# Altium PCB 球锁蓝牙20818.PcbDoc (part 2 of 3)
Units mm, origin at the board's own origin, x right, y up, seen from the top; angles counter-clockwise.
Board outline 49.43 x 48.4 mm, 2 copper layers (Top Layer, Bottom Layer); 90 components, 56 nets, 267 pads, 205 vias.
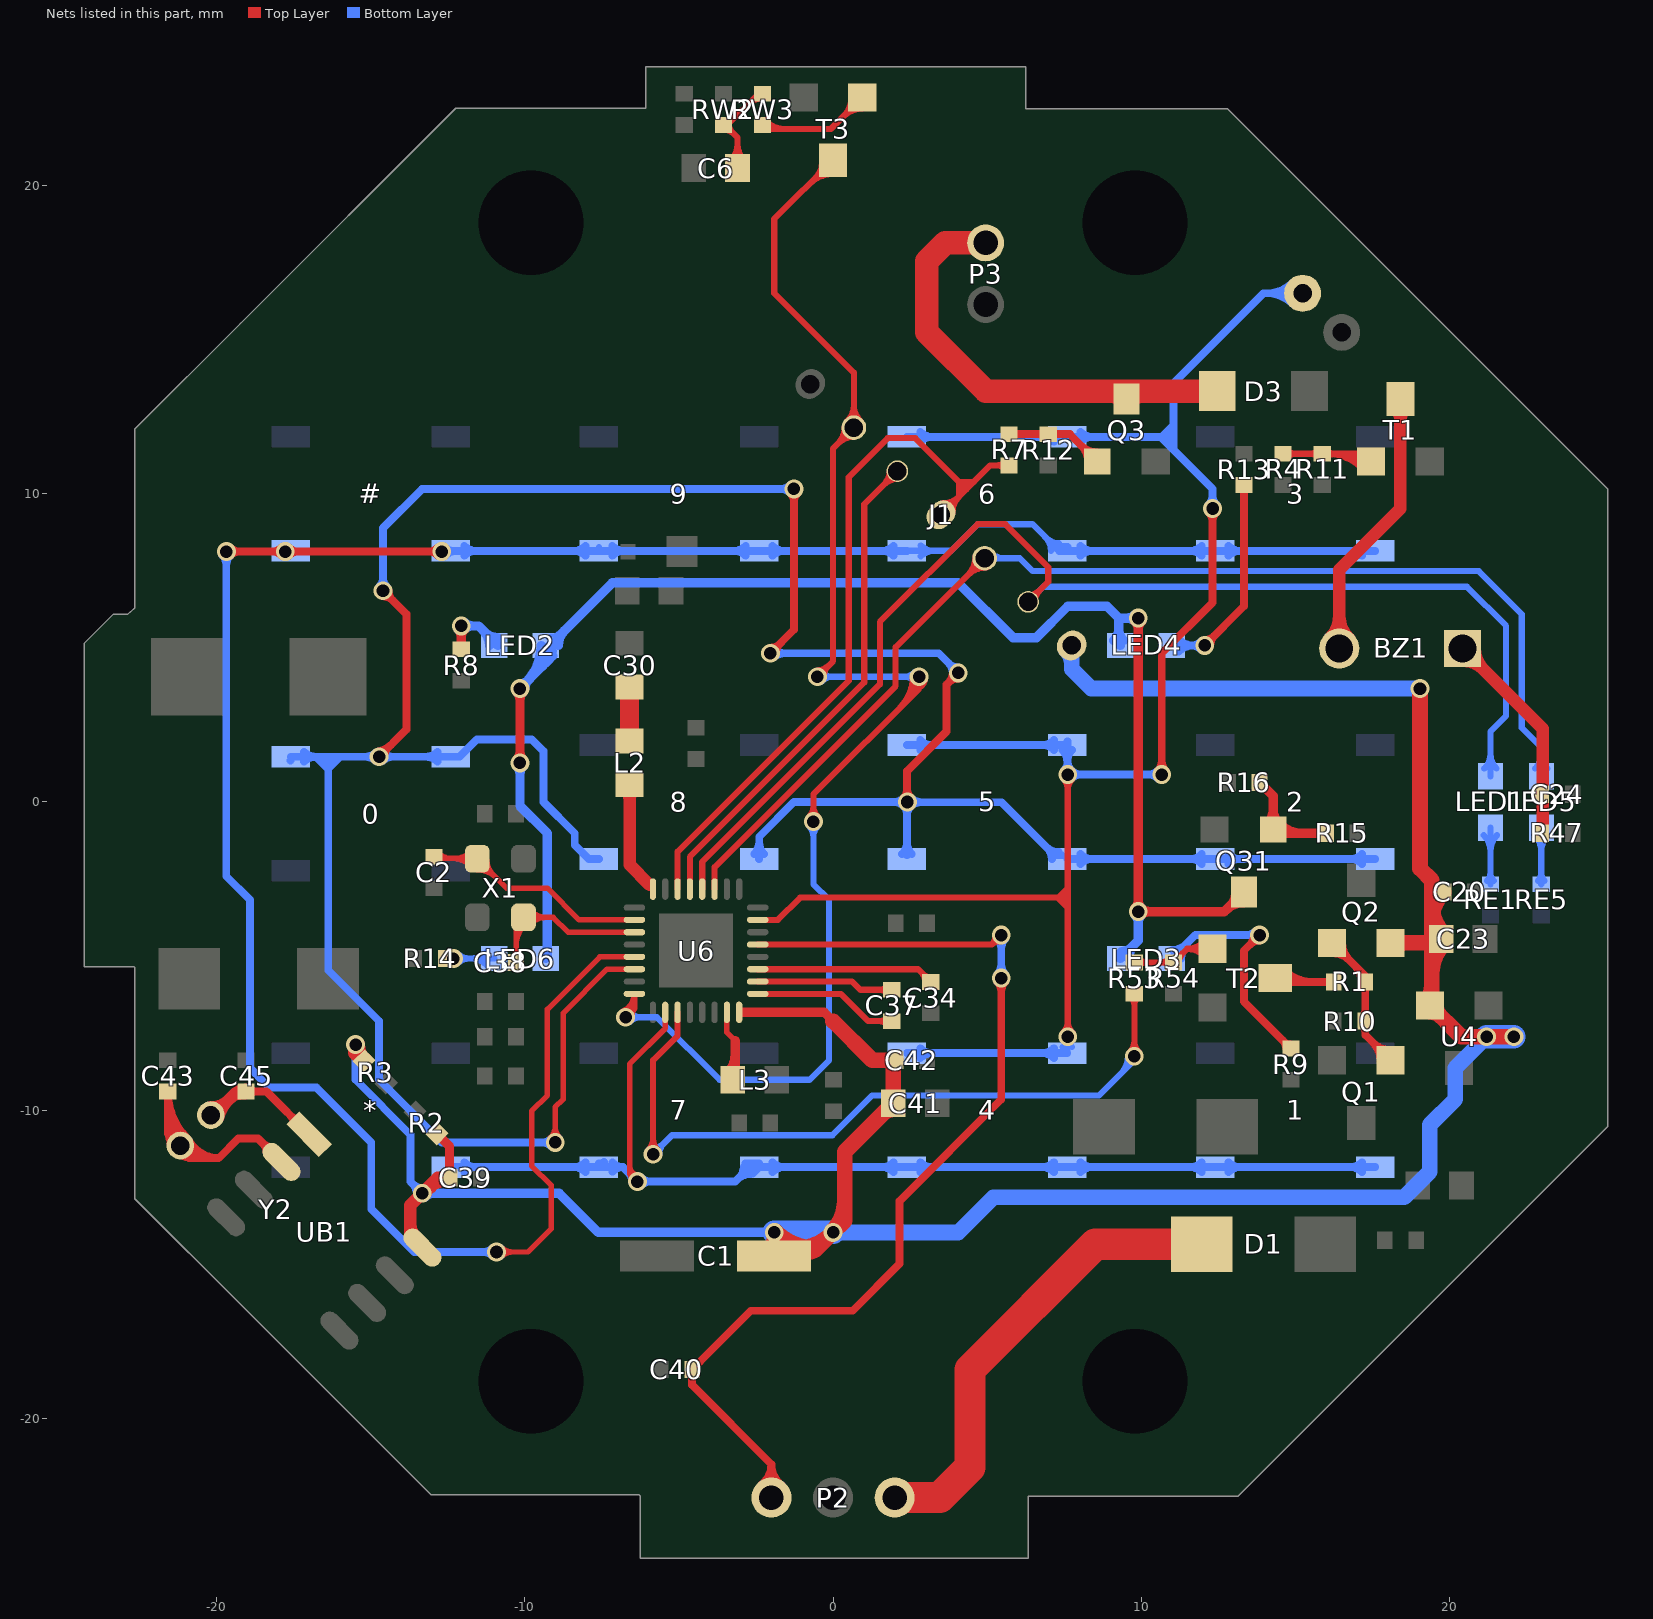
[diagram p2: the nets of this part, all layers, seen from the top]

## Via types
v1: diameter 0.61, hole 0.406, Top Layer to Bottom Layer, tented both sides, 204 vias
v2: diameter 0.6, hole 0.4, Top Layer to Bottom Layer, tented both sides, 1 vias

## Nets (pads, with @x,y where several pads share a name; then routed paths per layer and width w, separated by ;. In a path a pad name is that pad's centre, name@x,y a point inside that pad or via, vN(x,y) a via of type N, cw(c..) or ccw(c..) an arc to the next point about the centre after c; other vN are vias at no path point) (continued)
KEYY_1: 3.1 6.1 9.1 #.1 U6.5 | length 96
  Top Layer w0.178: v1(-10.922,-14.605) -9.906,-14.605 -9.144,-13.843 -9.144,-12.446 -9.779,-11.811 -9.779,-10.033 -9.271,-9.525 -9.271,-6.731 -7.566,-5.026 U6.5@-6.445,-5.026 ; v1@-10.769,-14.758 cw(c-10.401,-15.126) -10.401,-14.605 cw(c-10.401,-14.084) v1@-10.769,-14.452
  Top Layer w0.254: v1(-19.685,8.128) v1(-17.78,8.128) v1(-12.7,8.128) ; v1@-19.559,8.002 cw(c-19.256,7.699) -19.256,8.128 cw(c-19.256,8.557) v1@-19.559,8.254 ; v1@-17.906,8.002 ccw(c-18.209,7.699) -18.209,8.128 ccw(c-18.209,8.557) v1@-17.906,8.254 ; v1@-17.654,8.002 cw(c-17.351,7.699) -17.351,8.128 cw(c-17.351,8.557) v1@-17.654,8.254 ; v1@-12.826,8.002 ccw(c-13.129,7.699) -13.129,8.128 ccw(c-13.129,8.557) v1@-12.826,8.254
  Bottom Layer w0.203: 6.1@2.4,8.15 3.832,8.15 4.699,9.017 6.477,9.017 6.1@7.22,8.274 ; 6.1@2.851,7.974 cw(c3.275,7.55) 3.275,8.15 cw(c3.275,8.75) 6.1@2.851,8.326 ; 6.888,8.606 cw(c6.431,8.15) 6.1@7.077,8.15 ; 6.933,8.561 ccw(c7.325,8.952) 6.1@7.325,8.398
  Bottom Layer w0.254: v1@-19.811,8.002 cw(c-20.095,7.718) -19.693,7.718 ; -19.693,7.68 cw(c-19.237,7.68) v1@-19.559,8.002 ; v1@-19.693,8.128 -19.693,-2.405 -18.923,-3.175 -18.923,-8.636 -18.288,-9.271 -16.764,-9.271 -14.986,-11.049 -14.986,-13.208 -13.589,-14.605 v1(-10.922,-14.605) ; #.1@-12.574,8.002 cw(c-12.218,7.646) #.1@-12.218,8.15 ; #.1@-12.574,8.254 ccw(c-12.324,8.504) #.1@-12.324,8.15 ; #.1@-12.4,8.15 9.1@-7.6,8.15 9.1@-2.4,8.15 6.1@2.4,8.15 ; #.1@-11.967,7.992 cw(c-11.587,7.612) -11.587,8.15 cw(c-11.587,8.688) #.1@-11.967,8.308 ; v1@-11.048,-14.731 ccw(c-11.351,-15.034) -11.351,-14.605 ccw(c-11.351,-14.176) v1@-11.048,-14.479 ; 9.1@-8.033,7.992 ccw(c-8.413,7.612) -8.413,8.15 ccw(c-8.413,8.688) 9.1@-8.033,8.308 ; 9.1@-7.167,7.992 cw(c-6.787,7.612) -6.787,8.15 cw(c-6.787,8.688) 9.1@-7.167,8.308 ; 9.1@-2.833,7.992 ccw(c-3.213,7.612) -3.213,8.15 ccw(c-3.213,8.688) 9.1@-2.833,8.308 ; 9.1@-1.967,7.992 cw(c-1.587,7.612) -1.587,8.15 cw(c-1.587,8.688) 9.1@-1.967,8.308 ; 6.1@1.967,7.992 ccw(c1.587,7.612) 1.587,8.15 ccw(c1.587,8.688) 6.1@1.967,8.308 ; 6.1@7.604,8.274 7.22,8.274 7.344,8.15 6.1@7.6,8.15 3.1@12.4,8.15 3.1@17.6,8.15 ; 6.1@8.033,7.992 cw(c8.413,7.612) 8.413,8.15 cw(c8.413,8.688) 6.1@8.033,8.308 ; 3.1@11.967,7.992 ccw(c11.587,7.612) 11.587,8.15 ccw(c11.587,8.688) 3.1@11.967,8.308 ; 3.1@12.833,7.992 cw(c13.213,7.612) 13.213,8.15 cw(c13.213,8.688) 3.1@12.833,8.308 ; 3.1@17.167,7.992 ccw(c16.787,7.612) 16.787,8.15 ccw(c16.787,8.688) 3.1@17.167,8.308
KEYY_2: 0.1 2.1 5.1 8.1 U6.6 | length 120.6
  Top Layer w0.178: v1@-9.17,-10.896 ccw(c-9.538,-10.528) -9.017,-10.528 ccw(c-8.496,-10.528) v1@-8.864,-10.896 ; v1(-9.017,-11.049) -9.017,-9.906 -8.763,-9.652 -8.763,-6.858 -7.331,-5.426 U6.6@-6.445,-5.426
  Top Layer w0.254: v1(-14.732,1.469) -13.843,2.358 -13.843,6.096 v1(-14.605,6.858) ; v1@-14.732,1.649 ccw(c-14.865,2.364) -14.351,1.85 ; v1@-14.604,6.679 cw(c-14.604,6.25) -14.3,6.553 cw(c-13.997,6.857) v1@-14.426,6.857 ; v1@-14.6,1.396 cw(c-13.878,1.312) -14.478,1.723 ; v1(-2.032,4.826) -1.27,5.588 v1(-1.27,10.16) ; v1@-2.032,5.004 ccw(c-2.032,5.433) -1.728,5.13 ccw(c-1.425,4.826) v1@-1.854,4.826 ; v1@-1.396,10.034 cw(c-1.699,9.731) -1.27,9.731 cw(c-0.841,9.731) v1@-1.144,10.034 ; v1@2.287,0.126 ccw(c2.004,0.409) 2.405,0.409 ; v1@2.405,0 2.405,1.008 3.683,2.286 3.683,3.81 v1(4.064,4.191) ; 2.405,0.45 ccw(c2.863,0.45) v1@2.539,0.126 ; v1@3.886,4.191 cw(c3.457,4.191) 3.76,3.887 cw(c4.064,3.584) v1@4.064,4.013
  Bottom Layer w0.254: 0.1@-17.6,1.469 -16.787,1.469 ; 0.1@-17.167,1.311 cw(c-16.787,0.931) -16.787,1.469 ; 0.1@-17.167,1.627 ccw(c-16.787,2.007) -16.787,1.469 ; -16.383,1.345 -16.383,1.088 ; v1@-14.855,1.343 ccw(c-15.159,1.04) -15.159,1.469 ccw(c-15.159,1.898) v1@-14.855,1.595 ; v1@-14.729,6.982 ccw(c-15.033,7.286) -14.604,7.286 ccw(c-14.174,7.286) v1@-14.478,6.982 ; v1(-14.605,6.858) -14.605,8.89 -13.335,10.16 v1(-1.27,10.16) ; v1@-14.604,1.343 cw(c-14.3,1.04) -14.3,1.469 cw(c-14.3,1.898) v1@-14.604,1.595 ; 0.1@-12.833,1.311 ccw(c-13.213,0.931) -13.213,1.469 ccw(c-13.213,2.007) 0.1@-12.833,1.627 ; v1@-9.143,-11.175 ccw(c-9.446,-11.478) -9.446,-11.049 ccw(c-9.446,-10.62) v1@-9.143,-10.923 ; v1(-9.017,-11.049) -12.7,-11.049 -14.732,-9.017 -14.732,-7.112 -16.383,-5.461 -16.383,1.065 ; 8.1@-7.6,-1.85 -7.929,-1.85 -8.382,-1.397 -8.382,-1.016 -9.398,0 -9.398,1.651 -9.777,2.03 -11.559,2.03 -12.12,1.469 0.1@-12.4,1.469 v1(-14.732,1.469) -16.002,1.469 ; 8.1@-2.558,-1.692 ccw(c-2.949,-1.301) -2.396,-1.301 ; 8.1@-2.4,-1.85 -2.396,-1.846 -2.396,-1.126 -1.27,0 v1(2.413,0) ; -2.396,-1.322 ccw(c-1.872,-1.322) 8.1@-2.242,-1.692 ; v1(-2.032,4.826) 3.429,4.826 v1(4.064,4.191) ; v1@-1.906,4.7 cw(c-1.603,4.397) -1.603,4.826 cw(c-1.603,5.255) v1@-1.906,4.952 ; v1@-1.396,10.034 ccw(c-1.699,9.731) -1.699,10.16 ccw(c-1.699,10.589) v1@-1.396,10.286 ; 5.1@2.242,-1.692 ccw(c1.851,-1.301) 2.405,-1.301 ; v1@2.287,0.126 cw(c1.984,0.429) 1.984,0 cw(c1.984,-0.429) 2.287,-0.126 cw(c2.004,-0.409) 2.405,-0.409 ; 5.1@2.405,-1.726 2.405,-0.008 5.469,-0.008 7.187,-1.726 5.1@7.441,-1.726 ; 2.405,-1.322 ccw(c2.928,-1.322) 5.1@2.558,-1.692 ; 2.405,-0.45 cw(c2.863,-0.45) 2.539,-0.126 cw(c2.822,-0.409) 2.822,-0.008 ; v1@2.539,0.126 ccw(c2.863,0.45) 2.863,-0.008 ; v1@3.886,4.191 ccw(c3.457,4.191) 3.76,4.495 ccw(c4.064,4.798) v1@4.064,4.369 ; 6.92,-1.459 ccw(c7.325,-1.055) 5.1@7.325,-1.627 ; 6.954,-1.493 cw(c6.597,-1.85) 5.1@7.102,-1.85 ; 5.1@7.6,-1.85 2.1@12.4,-1.85 2.1@17.6,-1.85 ; 5.1@8.033,-2.008 cw(c8.413,-2.388) 8.413,-1.85 cw(c8.413,-1.312) 5.1@8.033,-1.692 ; 2.1@11.967,-2.008 ccw(c11.587,-2.388) 11.587,-1.85 ccw(c11.587,-1.312) 2.1@11.967,-1.692 ; 2.1@12.833,-2.008 cw(c13.213,-2.388) 13.213,-1.85 cw(c13.213,-1.312) 2.1@12.833,-1.692 ; 2.1@17.167,-2.008 ccw(c16.787,-2.388) 16.787,-1.85 ccw(c16.787,-1.312) 2.1@17.167,-1.692 ; -16.787,1.469 -16.383,1.065 ; -16.787,1.469 -16.002,1.469 ; -16.383,1.065 -16.383,1.088 ; -16.383,1.088 -16.002,1.469
KEYY_3: 1.1 4.1 7.1 *.1@-12.4,-11.85 U6.10 | length 50.4
  Top Layer w0.178: -6.604,-12.003 ccw(c-6.325,-12.003) v1@-6.347,-12.281 ; -6.604,-11.811 ccw(c-6.31,-11.811) v1@-6.333,-12.104 ; v1@-6.556,-12.256 ccw(c-6.739,-12.2) -6.604,-12.065 ; v1@-6.413,-12.113 cw(c-6.469,-11.93) -6.604,-12.065 ; v1(-6.35,-12.319) -6.604,-12.065 ; U6.10@-5.445,-6.826 -5.445,-7.35 -6.604,-8.509 -6.604,-12.065
  Bottom Layer w0.254: *.1@-12.4,-11.85 7.1@-7.6,-11.85 ; *.1@-11.967,-12.008 cw(c-11.587,-12.388) -11.587,-11.85 cw(c-11.587,-11.312) *.1@-11.967,-11.692 ; 7.1@-8.033,-12.008 ccw(c-8.413,-12.388) -8.413,-11.85 ccw(c-8.413,-11.312) 7.1@-8.033,-11.692 ; 7.1@-7.434,-11.684 7.1@-7.6,-11.85 ; 7.1@-7.16,-12 cw(c-6.819,-12.312) -6.819,-11.85 ; 7.1@-7.16,-11.7 ccw(c-6.819,-11.388) -6.819,-11.85 ; v1@-6.528,-12.319 ccw(c-6.957,-12.319) -6.654,-12.015 ccw(c-6.35,-11.712) v1@-6.35,-12.141 ; v1@-6.224,-12.445 cw(c-5.921,-12.748) -5.921,-12.319 cw(c-5.921,-11.89) v1@-6.224,-12.193 ; -3.109,-12.253 cw(c-2.675,-12.686) 7.1@-2.675,-12.073 ; -3.034,-12.178 ccw(c-3.362,-11.85) 7.1@-2.898,-11.85 ; 7.1@-2.836,-11.726 7.1@-2.396,-11.726 ; 7.1@-1.967,-12.008 cw(c-1.587,-12.388) -1.587,-11.85 cw(c-1.587,-11.312) 7.1@-1.967,-11.692 ; 4.1@1.967,-12.008 ccw(c1.587,-12.388) 1.587,-11.85 ccw(c1.587,-11.312) 4.1@1.967,-11.692 ; 4.1@2.833,-12.008 cw(c3.213,-12.388) 3.213,-11.85 cw(c3.213,-11.312) 4.1@2.833,-11.692 ; 4.1@7.167,-12.008 ccw(c6.787,-12.388) 6.787,-11.85 ccw(c6.787,-11.312) 4.1@7.167,-11.692 ; 4.1@8.033,-12.008 cw(c8.413,-12.388) 8.413,-11.85 cw(c8.413,-11.312) 4.1@8.033,-11.692 ; 1.1@11.967,-12.008 ccw(c11.587,-12.388) 11.587,-11.85 ccw(c11.587,-11.312) 1.1@11.967,-11.692 ; 1.1@12.833,-12.008 cw(c13.213,-12.388) 13.213,-11.85 cw(c13.213,-11.312) 1.1@12.833,-11.692 ; 1.1@17.167,-12.008 ccw(c16.787,-12.388) 16.787,-11.85 ccw(c16.787,-11.312) 1.1@17.167,-11.692 ; 1.1@17.6,-11.85 1.1@12.4,-11.85 4.1@7.6,-11.85 4.1@2.4,-11.85 7.1@-2.4,-11.85 ; 7.1@-7.6,-11.85 -6.819,-11.85 ; -6.819,-11.85 v1(-6.35,-12.319) -3.175,-12.319 7.1@-2.921,-12.065 ; 7.1@-2.921,-12.065 -2.706,-11.85 7.1@-2.4,-11.85 ; 7.1@-2.921,-12.065 -2.615,-12.065 7.1@-2.4,-11.85
M3V3: C1.1 C20.1 C23.1 C39.1 C41.1 C42.1 J1.1 Q2.S R2.1 R3.1 U4.2 U6.16 UB1.8 | length 113.6
  Top Layer w0.305: UB1.8@-13.335,-14.451 UB1.8@-13.324,-14.461 ; R2.1@-12.849,-10.773 -12.446,-11.176 C39.1@-12.446,-12.192 ; U6.16@-2.972,-6.826 -0.286,-6.826 0,-7.112
  Top Layer w0.406: -13.716,-13.733 ccw(c-13.232,-13.733) UB1.8@-13.574,-14.075 ; UB1.8@-13.335,-14.451 -13.716,-14.07 -13.716,-13.081 v1(-13.335,-12.7) -12.827,-12.192 C39.1@-12.446,-12.192 ; v1@-13.237,-12.726 cw(c-12.869,-12.825) -13.059,-12.495 ; v1@-13.226,-12.591 cw(c-12.446,-13.372) C39.1@-12.446,-12.268
  Top Layer w0.508: v1@-15.443,-7.874 ccw(c-14.707,-7.874) R3.1@-15.228,-8.394 ; R3.1@-15.218,-8.404 -15.494,-8.128 v1(-15.494,-7.874) ccw(c-14.901,-7.874) R3.1@-15.2,-8.386 ; C1.1@-2.595,-14.605 C1.1@-1.96,-14.605 ; C1.1@-2.084,-14.558 ccw(c-2.516,-14.126) v1@-1.905,-14.126 ; C1.1@-1.91,-14.478 C1.1@-1.905,-14.478 ; v1@-1.905,-14.15 ccw(c-1.328,-14.15) C1.1@-1.736,-14.558 ; v1(-1.905,-13.97) C1.1@-1.905,-14.478 ; v1@-1.869,-13.934 ccw(c-0.556,-12.621) -0.556,-14.478 ; C1.1@-1.21,-14.486 ccw(c-1.21,-12.811) v1@-0.025,-13.995 ; C1.1@-1.07,-14.529 ccw(c-0.82,-14.166) -0.508,-14.478 ; C1.1@-1.016,-14.605 C1.1@-1.96,-14.605 ; C1.1@-0.978,-14.812 cw(c-0.508,-14.975) -0.508,-14.478 ; v1@-0.036,-13.934 ccw(c-1.042,-12.928) 0.381,-12.928 ; 0,-7.112 1.27,-8.382 C42.1@2.032,-8.382 1.956,-8.458 C41.1@1.956,-9.779 0.381,-11.354 0.381,-13.589 v1(0,-13.97) -0.508,-14.478 ; C41.1@1.621,-10.114 cw(c1.956,-10.448) C41.1@1.956,-9.975 ; Q2.S@18.095,-4.572 C23.1@19.431,-4.572 ; Q2.S@18.239,-4.716 cw(c18.586,-5.063) 18.586,-4.572 cw(c18.586,-4.081) Q2.S@18.239,-4.428 ; v1(19.05,3.683) 19.05,-2.159 19.431,-2.54 19.431,-2.921 ; 19.197,-4.572 ccw(c19.197,-3.957) C23.1@19.633,-4.392 ; U4.2@19.226,-6.46 ccw(c18.732,-5.966) 19.431,-5.966 ; U4.2@19.37,-6.807 cw(c19.37,-7.298) 19.717,-6.951 cw(c20.064,-6.604) U4.2@19.573,-6.604 ; 19.431,-5.583 cw(c20.824,-5.583) C23.1@19.839,-4.598 ; 19.431,-3.866 cw(c20.732,-3.866) C20.1@19.812,-2.946 ; 19.431,-3.307 ccw(c20.824,-3.307) C23.1@19.839,-4.292 ; C23.1@19.736,-4.445 19.609,-4.572 C23.1@19.431,-4.572 ; C20.1@19.812,-2.921 19.431,-2.921 ; v1(22.098,-7.62) 20.386,-7.62 U4.2@19.37,-6.604 19.431,-6.543 C23.1@19.431,-4.572 ; C1.1@-1.96,-14.605 -1.905,-14.55 C1.1@-1.905,-14.478 ; C1.1@-1.905,-14.478 -0.508,-14.478 ; C23.1@19.431,-4.572 19.431,-2.921
  Bottom Layer w0.254: v1@-15.62,-8 cw(c-15.923,-8.303) -15.494,-8.303 cw(c-15.065,-8.303) v1@-15.368,-8 ; v1(-15.494,-7.874) -15.494,-9.017 -13.716,-10.795 -13.716,-12.319 v1(-13.335,-12.7) ; v1@-13.513,-12.7 ccw(c-13.942,-12.7) -13.639,-12.396 ccw(c-13.335,-12.093) v1@-13.335,-12.522
  Bottom Layer w0.305: v1(-13.335,-12.7) -8.89,-12.7 -7.62,-13.97 v1(-1.905,-13.97) ; v1@-13.227,-12.808 cw(c-12.967,-13.068) -12.967,-12.7 cw(c-12.967,-12.332) v1@-13.227,-12.592 ; v1@-2.013,-14.078 ccw(c-2.273,-14.338) -2.273,-13.97 ccw(c-2.273,-13.602) v1@-2.013,-13.862
  Bottom Layer w0.508: v1(0,-13.97) 4.064,-13.97 5.207,-12.827 18.542,-12.827 19.367,-12.002 19.367,-10.477 20.193,-9.652 20.193,-8.636 v1(21.209,-7.62) ; J1.1@7.573,4.906 cw(c7.153,4.486) 7.747,4.486 ; J1.1@7.747,5.08 7.747,4.318 8.382,3.683 v1(19.05,3.683)
  Bottom Layer w0.762: v1(-1.905,-13.97) v1(0,-13.97) ; v1(21.209,-7.62) v1(22.098,-7.62)
NetBZ1_1: BZ1.1 C24.2 R47.1 | length 8.6
  Top Layer w0.406: BZ1.1@20.43,4.587 cw(c20.43,3.629) 21.107,4.306 cw(c21.784,4.984) BZ1.1@20.827,4.984 ; BZ1.1@20.43,4.984 23.038,2.375 23.038,0.285 R47.1@23.038,-0.985
NetBZ1_2: BZ1.2 T1.3 | length 11.6
  Top Layer w0.406: BZ1.2@16.114,5.299 ccw(c15.351,6.062) 16.43,6.062 ccw(c17.508,6.062) BZ1.2@16.746,5.299 ; BZ1.2@16.43,4.984 16.43,6.27 16.43,7.54 18.415,9.525 T1.3@18.415,13.081 ; T1.3@18.235,12.809 cw(c17.802,12.375) 18.415,12.375 cw(c19.028,12.375) T1.3@18.595,12.809
NetC2_2: C2.2 U6.2 X1.1 | length 10.7
  Top Layer w0.178: C2.2@-12.954,-1.829 C2.2@-12.923,-1.829 ; C2.2@-12.954,-1.798 C2.2@-12.923,-1.829 ; C2.2@-12.812,-1.895 cw(c-12.653,-2.054) -12.653,-1.829 ; C2.2@-12.812,-1.661 ccw(c-12.407,-1.257) -12.407,-1.829 ; -12.333,-1.829 cw(c-12.333,-2.632) X1.1@-11.765,-2.064 ; -12.259,-1.829 ccw(c-12.259,-1.13) X1.1@-11.765,-1.624 ; X1.1@-11.545,-2.205 cw(c-11.545,-3.077) -10.929,-2.46 ; X1.1@-11.545,-2.027 cw(c-11.545,-2.47) X1.1@-11.232,-2.157 ; X1.1@-11.234,-1.894 ccw(c-10.604,-1.894) -11.049,-2.34 ; U6.2@-6.445,-3.826 -8.239,-3.826 -9.271,-2.794 -10.595,-2.794 X1.1@-11.545,-1.844 -11.56,-1.829 C2.2@-12.923,-1.829
NetC6_2: C6.2 RW2.2 RW3.2 | length 6
  Top Layer w0.203: RW2.2@-3.531,21.819 cw(c-3.531,21.389) -3.227,21.693 ; RW2.2@-3.531,22.123 ccw(c-3.531,22.737) -3.097,22.303 ; RW2.2@-3.378,21.971 ccw(c-3.072,21.971) RW2.2@-3.288,21.754 ; C6.2@-3.31,20.835 ccw(c-3.819,21.344) -3.099,21.344 ccw(c-2.378,21.344) C6.2@-2.888,20.835 ; C6.2@-3.099,20.574 -3.099,21.565 -3.556,22.022 -3.378,22.022 -2.464,22.936 RW3.2@-2.286,22.936 ; -2.745,22.655 cw(c-2.311,22.221) RW3.2@-2.311,22.835
NetC29_1: 
NetC29_2: 
NetC30_1: C30.1 L2.1 | length 1.8
  Top Layer w0.61: L2.1@-6.604,1.981 C30.1@-6.604,3.734
NetC34_1: C34.1 U6.19 | length 6.4
  Top Layer w0.2: U6.19@-2.445,-5.426 2.759,-5.426 C34.1@3.175,-5.842 ; 2.869,-5.536 cw(c2.562,-5.842) C34.1@2.996,-5.842 ; C34.1@2.93,-5.597 ccw(c3.15,-5.378) C34.1@3.15,-5.688
NetC37_1: C37.1 U6.17 | length 5.3
  Top Layer w0.2: U6.17@-2.445,-6.226 0.257,-6.226 1.143,-7.112 C37.1@1.905,-7.112 ; C37.1@1.771,-7.221 ccw(c1.508,-7.484) 1.508,-7.112 ccw(c1.508,-6.74) C37.1@1.771,-7.003
NetC37_2: C37.2 U6.18 | length 5
  Top Layer w0.2: U6.18@-2.445,-5.826 0.619,-5.826 0.889,-6.096 C37.2@1.905,-6.096 ; C37.2@1.771,-6.205 ccw(c1.508,-6.468) 1.508,-6.096 ccw(c1.508,-5.724) C37.2@1.771,-5.987
NetC38_2: C38.2 U6.3 X1.3 | length 10.3
  Top Layer w0.178: C38.2@-10.404,-5.065 ccw(c-10.686,-4.783) -10.287,-4.783 ccw(c-9.888,-4.783) C38.2@-10.17,-5.065 ; C38.2@-10.338,-5.207 C38.2@-10.287,-5.156 ; C38.2@-10.287,-5.207 C38.2@-10.287,-5.156 ; -10.287,-4.7 cw(c-9.139,-4.7) X1.3@-9.951,-3.888 ; -10.287,-4.271 cw(c-9.568,-4.271) X1.3@-10.076,-3.763 ; X1.3@-9.825,-3.964 cw(c-9.294,-4.495) -9.294,-3.744 cw(c-9.294,-2.993) X1.3@-9.825,-3.524 ; -6.985,-4.226 -8.601,-4.226 ; U6.3@-6.445,-4.226 -8.601,-4.226 ; C38.2@-10.287,-5.156 -10.287,-3.986 X1.3@-10.045,-3.744 -9.083,-3.744 -8.601,-4.226
NetC43_1: C43.1 UB1.2 Y2.2 | length 14.9
  Top Layer w0.254: C43.1@-21.68,-9.488 cw(c-21.897,-9.705) -21.59,-9.705 cw(c-21.283,-9.705) C43.1@-21.5,-9.488 ; -21.59,-10.617 ccw(c-20.655,-10.617) Y2.2@-21.313,-11.281 ; -21.59,-10.008 ccw(c-20.05,-10.008) Y2.2@-21.134,-11.101 ; Y2.2@-21.497,-11.074 ccw(c-21.838,-10.991) -21.59,-10.743 ; Y2.2@-21.344,-11.24 ccw(c-20.805,-10.939) -20.805,-11.557 ; Y2.2@-21.259,-10.836 cw(c-21.342,-10.495) -21.59,-10.743 ; Y2.2@-21.123,-11.116 ccw(c-20.372,-10.697) -20.372,-11.557 ; Y2.2@-21.107,-11.464 cw(c-21.024,-11.805) -20.776,-11.557 ; Y2.2@-20.956,-10.921 cw(c-19.446,-9.398) C43.1@-21.59,-9.398 -21.59,-10.743 ; Y2.2@-20.901,-10.992 ccw(c-19.939,-10.455) -19.939,-11.557 ; Y2.2@-20.869,-11.226 ccw(c-20.528,-11.309) -20.776,-11.557 ; UB1.2@-18.391,-11.364 ccw(c-18.808,-11.364) -18.513,-11.069 ccw(c-18.218,-10.774) UB1.2@-18.218,-11.191 ; UB1.2@-17.899,-11.683 -18.66,-10.922 -19.304,-10.922 -19.939,-11.557 ; -21.59,-10.743 Y2.2@-21.183,-11.15 -20.776,-11.557 ; -20.776,-11.557 -19.939,-11.557
NetC45_2: C45.2 UB1.1 Y2.1 | length 9.5
  Top Layer w0.254: Y2.1@-20.193,-10.16 -19.431,-9.398 C45.2@-19.05,-9.398 -18.388,-9.398 UB1.1@-17.001,-10.784 ; Y2.1@-20.193,-9.837 ccw(c-20.193,-9.057) -19.642,-9.609 ccw(c-19.09,-10.16) Y2.1@-19.87,-10.16 ; Y2.1@-20.109,-9.848 ccw(c-20.003,-9.449) -19.796,-9.807 ; Y2.1@-19.899,-9.866 cw(c-19.075,-10.69) C45.2@-19.075,-9.525 ; Y2.1@-19.881,-10.244 cw(c-18.773,-10.54) -19.347,-9.547 ; -19.466,-9.433 cw(c-19.075,-9.823) C45.2@-19.075,-9.271 ; C45.2@-19.165,-9.488 ccw(c-19.382,-9.705) -19.382,-9.398 ccw(c-19.382,-9.091) C45.2@-19.165,-9.308 ; C45.2@-18.935,-9.488 cw(c-18.718,-9.705) -18.718,-9.398 cw(c-18.718,-9.091) C45.2@-18.935,-9.308 ; UB1.1@-17.493,-10.466 ccw(c-17.91,-10.466) -17.615,-10.171 ccw(c-17.32,-9.876) UB1.1@-17.32,-10.293
NetD1_1: D1.1 P2.1 | length 16.7
  Top Layer w1.016: P2.1@2,-22.575 3.46,-22.575 4.445,-21.59 4.445,-18.415 8.509,-14.351 D1.1@11.97,-14.351 ; D1.1@11.593,-14.628 ccw(c10.924,-15.297) 10.924,-14.351 ccw(c10.924,-13.405) D1.1@11.593,-14.074
NetD3_1: D3.1 P3.1 Q3.C | length 15.8
  Top Layer w0.762: P3.1@4.953,18.145 3.636,18.145 3.048,17.557 3.048,15.24 4.953,13.335 D3.1@12.47,13.335 ; 8.987,13.335 cw(c8.987,12.618) Q3.C@9.494,13.125 ; Q3.C@9.556,13.125 cw(c10.063,12.618) 10.063,13.335
NetL2_2: L2.2 U6.32 | length 4.3
  Top Layer w0.406: L2.2@-6.743,0.42 cw(c-7.079,0.084) -6.604,0.084 cw(c-6.129,0.084) L2.2@-6.465,0.42 ; L2.2@-6.604,0.559 -6.604,-2.032 -5.948,-2.688
NetL3_2: L3.2 U6.15 | length 3.3
  Top Layer w0.178: U6.15@-3.445,-6.826 -3.445,-7.477 -3.175,-7.747
  Top Layer w0.305: L3.2@-3.426,-8.792 ccw(c-4.033,-8.185) -3.175,-8.185 ; L3.2@-3.251,-9.017 -3.175,-8.941 -3.175,-7.747 ; -3.175,-8.553 ccw(c-2.837,-8.553) L3.2@-3.076,-8.792
NetLED1_1: LED1.1 RE1.2 | length 3.6
  Bottom Layer w0.203: LED1.1@21.12,-1.079 cw(c20.6,-1.599) 21.336,-1.599 cw(c22.072,-1.599) LED1.1@21.552,-1.079 ; RE1.2@21.228,-2.559 ccw(c20.968,-2.299) 21.336,-2.299 ccw(c21.704,-2.299) RE1.2@21.444,-2.559 ; RE1.2@21.336,-2.667 LED1.1@21.336,-0.838
NetLED2_1: LED2.1 R8.2 | length 4.4
  Top Layer w0.3: v1@-12.174,5.606 cw(c-12.439,5.341) -12.065,5.341 cw(c-11.691,5.341) v1@-11.956,5.606 ; R8.2@-12.065,4.953 v1(-12.065,5.715)
  Bottom Layer w0.3: v1(-12.065,5.715) -11.506,5.715 LED2.1@-10.871,5.08 ; v1@-11.956,5.606 cw(c-11.691,5.341) -11.691,5.715 cw(c-11.691,6.089) v1@-11.956,5.824 ; -11.352,5.561 cw(c-11.833,5.08) LED2.1@-11.153,5.08 ; -11.291,5.5 ccw(c-10.897,5.894) LED2.1@-10.897,5.336
NetLED2_2: LED2.2 LED3.2 LED4.2 LED6.2 Q31.C | length 60.7
  Top Layer w0.305: v1@-10.268,1.365 ccw(c-10.528,1.626) -10.16,1.626 ccw(c-9.792,1.626) v1@-10.052,1.365 ; v1@-10.268,3.575 cw(c-10.528,3.315) -10.16,3.315 cw(c-9.792,3.315) v1@-10.052,3.575 ; v1(-10.16,1.27) v1(-10.16,3.683) ; v1@9.798,-3.448 ccw(c9.538,-3.188) 9.906,-3.188 ccw(c10.274,-3.188) 10.014,-3.448 ccw(c10.274,-3.188) 10.274,-3.556 ccw(c10.274,-3.924) v1@10.014,-3.664 ; v1@9.798,5.861 cw(c9.538,5.601) 9.906,5.601 cw(c10.274,5.601) v1@10.014,5.861 ; v1(9.906,5.969) v1(9.906,-3.556) 12.7,-3.556 Q31.C@13.335,-2.921 ; 12.742,-3.514 cw(c13.335,-4.108) Q31.C@13.335,-3.269 ; Q31.C@12.923,-3.333 ccw(c12.585,-2.996) Q31.C@13.062,-2.996
  Bottom Layer w0.305: v1@-10.268,1.175 cw(c-10.528,0.914) -10.16,0.914 cw(c-9.792,0.914) v1@-10.052,1.175 ; v1(-10.16,1.27) -10.16,-0.127 -9.271,-1.016 -9.271,-5.029 LED6.2@-9.322,-5.08 LED6.2@-9.322,-4.902 ; v1(-10.16,3.683) -9.457,4.386 ; v1@-10.16,3.835 ccw(c-10.16,4.203) -9.9,3.943 ccw(c-9.64,3.683) v1@-10.008,3.683 ; v1@-9.977,3.866 ccw(c-11.191,5.08) LED2.2@-9.474,5.08 ; LED2.2@-9.407,4.918 cw(c-9.736,4.589) -9.271,4.589 ; LED2.2@-9.169,5.08 cw(c-10.151,5.08) -9.457,4.386 ; LED2.2@-9.144,5.309 ccw(c-9.144,5.738) -8.84,5.434 ; LED2.2@-9.108,4.897 ccw(c-8.863,4.571) -9.271,4.571 ; LED2.2@-9.095,4.748 -9.271,4.572 ; LED2.2@-8.915,5.08 cw(c-8.241,5.08) -8.718,5.557 ; LED4.2@9.109,5.242 ccw(c8.719,5.632) 9.271,5.632 ccw(c9.823,5.632) LED4.2@9.433,5.242 ; LED3.2@9.322,-4.902 LED3.2@9.322,-5.08 9.906,-4.496 v1(9.906,-3.556) ; LED4.2@9.322,5.08 9.271,5.131 9.271,5.969 ; LED3.2@9.373,-4.851 ccw(c9.373,-4.422) LED3.2@9.676,-4.726 ; LED3.2@9.601,-5.08 cw(c10.276,-5.08) 9.799,-4.603 ; v1@9.798,-3.664 cw(c9.538,-3.924) 9.906,-3.924 cw(c10.274,-3.924) v1@10.014,-3.664 ; v1@9.798,5.861 ccw(c9.538,5.601) 9.538,5.969 ccw(c9.538,6.337) v1@9.798,6.077 ; v1(9.906,5.969) 9.271,5.969 ; -9.457,4.386 -9.271,4.572 ; -9.271,4.572 LED2.2@-9.271,4.826 ; LED2.2@-9.271,4.826 -9.271,5.004 LED2.2@-9.195,5.08 ; LED2.2@-9.271,4.826 -9.195,4.902 LED2.2@-9.195,5.08 ; LED2.2@-9.195,5.08 -7.163,7.112 4.064,7.112 5.842,5.334 6.604,5.334 7.62,6.35 8.89,6.35 9.271,5.969
NetLED3_1: LED3.1 R9.2 | length 10.6
  Top Layer w0.254: v1@13.665,-4.318 cw(c13.236,-4.318) 13.539,-4.622 cw(c13.843,-4.925) v1@13.843,-4.496 ; v1(13.843,-4.318) 13.335,-4.826 13.335,-6.477 R9.2@14.859,-8.001 ; 14.599,-7.741 cw(c14.339,-8.001) R9.2@14.707,-8.001 ; R9.2@14.66,-7.802 ccw(c14.834,-7.629) R9.2@14.834,-7.874
  Bottom Layer w0.254: LED3.1@10.998,-5.08 11.76,-4.318 v1(13.843,-4.318) ; LED3.1@11.024,-4.801 ccw(c11.024,-4.187) 11.457,-4.621 ; LED3.1@11.303,-5.08 cw(c12.039,-5.08) 11.519,-4.56 ; v1@13.717,-4.444 ccw(c13.414,-4.747) 13.414,-4.318 ccw(c13.414,-3.889) v1@13.717,-4.192
NetLED4_1: LED4.1 R13.2 | length 9.7
  Top Layer w0.254: v1(12.065,5.08) 13.335,6.35 R13.2@13.335,10.287 ; v1@12.065,5.258 ccw(c12.065,5.687) 12.369,5.384 ccw(c12.672,5.08) v1@12.243,5.08 ; R13.2@13.245,10.197 cw(c13.028,9.98) 13.335,9.98 cw(c13.642,9.98) R13.2@13.425,10.197
  Bottom Layer w0.254: LED4.1@10.998,5.08 v1(12.065,5.08) ; LED4.1@11.221,4.882 cw(c11.698,4.405) 11.698,5.08 cw(c11.698,5.755) LED4.1@11.221,5.278 ; v1@11.939,4.954 ccw(c11.636,4.651) 11.636,5.08 ccw(c11.636,5.509) v1@11.939,5.206
NetLED5_1: LED5.1 RE5.2 | length 3.6
  Bottom Layer w0.2: LED5.1@22.77,-1.08 cw(c22.247,-1.603) 22.987,-1.603 cw(c23.727,-1.603) LED5.1@23.204,-1.08 ; RE5.2@22.878,-2.558 ccw(c22.615,-2.295) 22.987,-2.295 ccw(c23.359,-2.295) RE5.2@23.096,-2.558 ; RE5.2@22.987,-2.667 LED5.1@22.987,-0.838
NetLED6_1: LED6.1 R14.2 | length 3.5
  Top Layer w0.305: R14.2@-12.573,-5.08 v1(-12.319,-5.08)
  Bottom Layer w0.203: v1(-12.319,-5.08) LED6.1@-10.998,-5.08 ; v1@-12.175,-5.224 cw(c-11.828,-5.571) -11.828,-5.08 cw(c-11.828,-4.589) v1@-12.175,-4.936 ; LED6.1@-11.239,-5.296 ccw(c-11.759,-5.816) -11.759,-5.08 ccw(c-11.759,-4.344) LED6.1@-11.239,-4.864
NetQ1_G: Q1.G Q2.G R1.1 R10.2 | length 9.4
  Top Layer w0.254: Q2.G@16.195,-4.902 cw(c16.195,-5.699) 16.759,-5.136 cw(c17.322,-4.572) Q2.G@16.525,-4.572 ; Q2.G@16.195,-4.572 17.272,-5.649 R1.1@17.272,-5.842 R10.2@17.272,-7.112 17.272,-7.559 Q1.G@18.095,-8.382 Q1.G@18.095,-8.062 ; 16.937,-5.314 cw(c16.434,-5.817) R1.1@17.145,-5.817 ; R10.2@17.182,-7.227 cw(c16.965,-7.444) 17.272,-7.444 cw(c17.579,-7.444) R10.2@17.362,-7.227 ; R10.2@17.182,-6.997 ccw(c16.965,-6.78) 17.272,-6.78 ccw(c17.579,-6.78) R10.2@17.362,-6.997 ; R1.1@17.182,-5.957 cw(c16.965,-6.174) 17.272,-6.174 cw(c17.579,-6.174) R1.1@17.362,-5.957 ; Q1.G@17.765,-8.382 ccw(c16.968,-8.382) 17.531,-7.818 ccw(c18.095,-7.255) Q1.G@18.095,-8.052
NetQ3_B: Q3.B R7.1 R12.1 | length 6.9
  Top Layer w0.254: R7.1@5.715,11.938 R12.1@6.985,11.938 ; R7.1@5.83,11.848 cw(c6.047,11.631) 6.047,11.938 cw(c6.047,12.245) R7.1@5.83,12.028 ; R12.1@6.87,11.848 ccw(c6.653,11.631) 6.653,11.938 ccw(c6.653,12.245) R12.1@6.87,12.028 ; 7.62,11.938 R12.1@6.985,11.938 ; Q3.B@8.277,11.049 ccw(c7.558,11.049) 8.066,11.558 ccw(c8.575,12.066) Q3.B@8.575,11.347 ; Q3.B@8.575,11.049 7.686,11.938 R12.1@6.985,11.938 ; 7.317,11.938 ccw(c7.317,11.631) 7.1,11.848 cw(c7.317,11.631) 7.317,11.938 ; 7.317,11.938 cw(c7.317,12.245) 7.1,12.028 ccw(c7.317,12.245) 7.317,11.938
NetQ31_B: Q31.B R15.1 R16.2 | length 5.6
  Top Layer w0.3: R16.2@13.843,0.506 cw(c13.843,0.193) R16.2@14.064,0.414 ; R16.2@13.843,0.635 14.285,0.193 Q31.B@14.285,-0.889 14.412,-1.016 R15.1@16.002,-1.016 ; Q31.B@14.091,-0.695 ccw(c13.621,-0.225) 14.285,-0.225 ccw(c14.949,-0.225) 14.479,-0.695 ccw(c15.256,0.082) 15.256,-1.016
NetR1_2: R1.2 T2.3 | length 4.4
  Top Layer w0.254: T2.3@14.498,-5.661 ccw(c14.934,-5.224) 14.934,-5.842 ccw(c14.934,-6.206) T2.3@14.677,-5.948 ; T2.3@14.605,-5.715 T2.3@14.351,-5.715 14.478,-5.842 R1.2@16.256,-5.842 ; T2.3@14.677,-5.482 ccw(c15.548,-4.611) 15.548,-5.842 ; R1.2@16.166,-5.932 ccw(c15.949,-6.149) 15.949,-5.842 ccw(c15.949,-5.535) R1.2@16.166,-5.752
NetR4_1: R4.1 R11.1 T1.1 | length 7.7
  Top Layer w0.2: R4.1@14.605,11.303 R11.1@15.875,11.303 17.211,11.303 T1.1@17.465,11.049 ; R4.1@14.739,11.194 cw(c15.002,10.931) 15.002,11.303 cw(c15.002,11.675) R4.1@14.739,11.412 ; R11.1@15.741,11.194 ccw(c15.478,10.931) 15.478,11.303 ccw(c15.478,11.675) R11.1@15.741,11.412 ; R11.1@15.989,11.303 cw(c15.989,9.573) T1.1@17.212,10.796 ; R11.1@16.009,11.194 cw(c16.272,10.931) 16.272,11.303 cw(c16.272,11.675) R11.1@16.009,11.412 ; 16.472,11.303 cw(c16.472,10.056) T1.1@17.354,10.938 ; 16.955,11.303 cw(c16.955,10.539) T1.1@17.495,11.079
NetR53_2: R53.2 R54.2 T2.1 | length 5.7
  Top Layer w0.203: R53.2@9.779,-5.207 R54.2@11.049,-5.207 11.491,-4.765 ; R53.2@9.912,-5.315 cw(c10.172,-5.575) 10.172,-5.207 cw(c10.172,-4.839) R53.2@9.912,-5.099 ; R54.2@10.916,-5.315 ccw(c10.656,-5.575) 10.656,-5.207 ccw(c10.656,-4.839) R54.2@10.916,-5.099 ; R54.2@11.074,-5.055 ccw(c11.074,-4.748) R54.2@11.291,-4.965 ; R54.2@11.227,-5.207 cw(c11.656,-5.207) 11.353,-4.903 ; T2.1@12.061,-5.01 ccw(c11.491,-5.551) 11.491,-4.765 ; T2.1@12.061,-4.52 cw(c11.491,-3.979) 11.491,-4.765 ; T2.1@12.319,-4.765 11.491,-4.765
NetRW3_1: RW3.1 T3.1 | length 5.7
  Top Layer w0.203: RW3.1@-2.286,22.022 -2.108,21.844 -0.066,21.844 T3.1@0.95,22.86 ; RW3.1@-2.153,22.079 ccw(c-1.586,22.646) -1.586,21.844 ; T3.1@0.594,22.86 cw(c-0.264,22.86) 0.343,22.253 cw(c0.95,21.646) T3.1@0.95,22.504
P04/LED_RED: J1.3 LED5.2 U6.27 | length 41.8
  Top Layer w0.2: U6.27@-3.845,-2.826 -3.845,-2.113 2.032,3.764 2.032,5.022 J1.3@4.919,7.908 ; J1.3@4.624,7.963 cw(c3.779,7.963) 4.376,7.366 cw(c4.974,6.769) J1.3@4.974,7.613
  Bottom Layer w0.203: J1.3@4.919,7.908 6.062,7.908 6.477,7.493 20.955,7.493 22.352,6.096 22.352,2.413 22.987,1.778 LED5.2@22.987,0.838 ; J1.3@4.937,7.697 cw(c5.446,7.188) 5.446,7.908 ; J1.3@4.937,8.19 ccw(c5.617,8.87) 5.617,7.908 ; LED5.2@22.789,1.087 ccw(c22.312,1.564) 22.987,1.564 ccw(c23.662,1.564) LED5.2@23.185,1.087
P05/LED_GREEN: J1.2 LED1.2 U6.28 | length 43.5
  Top Layer w0.2: U6.28@-4.245,-2.826 -4.245,-1.947 1.524,3.822 1.524,5.842 4.699,9.017 5.588,9.017 6.985,7.62 6.985,7.146 J1.2@6.333,6.494 ; J1.2@6.134,6.645 ccw(c6.134,7.49) 6.731,6.892 ccw(c7.328,6.295) J1.2@6.484,6.295
  Bottom Layer w0.203: J1.2@6.333,6.494 6.824,6.985 20.574,6.985 21.844,5.715 21.844,2.794 21.336,2.286 LED1.2@21.336,0.838 ; LED1.2@21.138,1.087 ccw(c20.661,1.564) 21.336,1.564 ccw(c22.011,1.564) LED1.2@21.534,1.087
P06/MOTO1: J1.5 U6.29 | length 17.5
  Top Layer w0.2: U6.29@-4.645,-2.826 -4.645,-1.782 1.016,3.879 1.016,9.663 J1.5@2.09,10.737 ; J1.5@1.852,10.799 cw(c1.128,10.799) 1.64,10.287 cw(c2.152,9.775) J1.5@2.152,10.499
P07/MOTO0: J1.4 R7.2 U6.30 | length 26.3
  Top Layer w0.2: U6.30@-5.045,-2.826 -5.045,-1.616 0.508,3.937 0.508,10.541 1.778,11.811 2.667,11.811 4.088,10.39 ; J1.4@3.504,9.323 4.088,9.906 ; J1.4@3.576,9.694 ccw(c3.576,10.418) 4.088,9.906 ; J1.4@3.876,9.394 cw(c4.6,9.394) 4.088,9.906 ; R7.2@5.581,10.813 ccw(c5.318,10.55) 5.318,10.922 ccw(c5.318,11.294) R7.2@5.581,11.031 ; R7.2@5.715,10.922 5.104,10.922 4.572,10.39 ; 4.088,9.906 4.33,10.148 ; 4.088,9.906 4.088,10.39 ; 4.088,10.39 4.572,10.39 ; 4.088,10.39 4.33,10.148 ; 4.33,10.148 4.572,10.39
PWR_CTL: R53.1 U6.11 | length 27.5
  Top Layer w0.2: v1@-5.987,-11.285 ccw(c-6.336,-10.936) -5.842,-10.936 ccw(c-5.348,-10.936) v1@-5.697,-11.285 ; v1(-5.842,-11.43) -5.842,-8.382 -5.045,-7.585 U6.11@-5.045,-6.826 ; v1@9.634,-8.11 ccw(c9.285,-7.761) 9.779,-7.761 ccw(c10.273,-7.761) v1@9.924,-8.11 ; R53.1@9.67,-6.332 cw(c9.407,-6.595) 9.779,-6.595 cw(c10.151,-6.595) R53.1@9.888,-6.332 ; v1(9.779,-8.255) R53.1@9.779,-6.223
  Bottom Layer w0.2: v1(-5.842,-11.43) -5.226,-10.814 -0.019,-10.814 1.27,-9.525 8.636,-9.525 9.779,-8.382 v1(9.779,-8.255) ; v1@-5.842,-11.225 ccw(c-5.842,-10.731) -5.492,-11.08 ccw(c-5.143,-11.43) v1@-5.637,-11.43 ; 9.34,-8.821 ccw(c8.773,-8.255) v1@9.574,-8.255
RD1_KEYX_2: 4.2 5.2 6.2 pad.1@15.24,16.51 U6.23 | length 79.3
  Top Layer w0.2: U6.23@-2.445,-3.826 -1.794,-3.826 -1.072,-3.104 7.295,-3.104 ; v1@7.475,-7.475 ccw(c7.126,-7.126) 7.62,-7.126 ccw(c8.114,-7.126) v1@7.765,-7.475 ; v1@7.475,0.744 cw(c7.126,0.395) 7.62,0.395 cw(c8.114,0.395) v1@7.765,0.744 ; v1(7.62,-7.62) 7.62,-3.429 ; v1(7.62,0.889) 7.62,-2.794 ; 7.295,-3.104 7.62,-3.429 ; 7.295,-3.104 7.31,-3.104 ; 7.31,-3.104 7.62,-2.794 ; 7.31,-3.104 7.549,-3.104 7.62,-3.175 ; 7.62,-3.429 7.62,-3.175 ; 7.62,-3.175 7.62,-2.794
  Top Layer w0.254: v1@10.542,1.015 ccw(c10.239,1.318) 10.668,1.318 ccw(c11.097,1.318) v1@10.794,1.015 ; v1(10.668,0.889) 10.668,4.826 12.319,6.477 v1(12.319,9.525) ; v1@12.193,9.399 cw(c11.89,9.096) 12.319,9.096 cw(c12.748,9.096) v1@12.445,9.399
  Bottom Layer w0.2: 4.2@7.448,-7.951 ccw(c7.207,-7.636) v1@7.604,-7.636 ; v1@7.488,-7.777 cw(c7.278,-8.027) 4.2@7.604,-8.027 ; v1(7.62,-7.62) v1@7.604,-7.636 ; v1@7.732,-7.792 ccw(c7.885,-8.027) 4.2@7.604,-8.027 ; 4.2@7.757,-7.956 cw(c8.016,-7.636) v1@7.604,-7.636 ; 4.2@7.604,-8.026 v1@7.604,-7.636
  Bottom Layer w0.254: 4.2@2.4,-8.15 4.2@7.6,-8.15 ; 5.2@2.4,1.85 5.2@7.6,1.85 ; 6.2@2.4,11.85 6.2@7.6,11.85 10.668,11.85 ; 4.2@2.833,-8.308 cw(c3.213,-8.688) 3.213,-8.15 cw(c3.213,-7.612) 4.2@2.833,-7.992 ; 5.2@2.833,1.692 cw(c3.213,1.312) 3.213,1.85 cw(c3.213,2.388) 5.2@2.833,2.008 ; 6.2@2.833,11.692 cw(c3.213,11.312) 3.213,11.85 cw(c3.213,12.388) 6.2@2.833,12.008 ; 4.2@7.167,-8.308 ccw(c6.787,-8.688) 6.787,-8.15 ccw(c6.787,-7.612) 4.2@7.167,-7.992 ; 5.2@7.167,1.692 ccw(c6.787,1.312) 6.787,1.85 ccw(c6.787,2.388) 5.2@7.167,2.008 ; 6.2@7.167,11.692 ccw(c6.787,11.312) 6.787,11.85 ccw(c6.787,12.388) 6.2@7.167,12.008 ; 5.2@7.442,1.692 cw(c7.051,1.301) 7.604,1.301 ; v1@7.494,1.015 ccw(c7.228,1.281) 7.604,1.281 ; 7.604,1.322 cw(c8.128,1.322) 5.2@7.758,1.692 ; 7.604,1.356 ccw(c8.087,1.356) 7.746,1.015 ccw(c8.049,1.318) 8.049,0.889 ccw(c8.049,0.46) v1@7.746,0.763 ; 5.2@7.604,1.974 7.604,0.905 v1(7.62,0.889) v1(10.668,0.889) ; 6.2@8.033,11.692 cw(c8.413,11.312) 8.413,11.85 cw(c8.413,12.388) 6.2@8.033,12.008 ; v1@10.542,0.763 ccw(c10.239,0.46) 10.239,0.889 ccw(c10.239,1.318) v1@10.542,1.015 ; v1@12.193,9.651 ccw(c11.89,9.954) 12.319,9.954 ccw(c12.748,9.954) v1@12.445,9.651 ; v1(12.319,9.525) 12.319,10.16 11.049,11.43 ; pad.1@14.906,16.176 ccw(c14.098,15.368) 14.098,16.51 ccw(c14.098,17.652) pad.1@14.906,16.844 ; pad.1@15.24,16.51 13.97,16.51 11.049,13.589 11.049,12.231 ; 10.668,11.85 11.049,12.231 ; 10.668,11.85 10.668,11.811 11.049,11.43 ; 10.668,11.85 11.049,11.85 ; 11.049,11.43 11.049,11.85 ; 11.049,11.85 11.049,12.231
RSTN: J1.6 T3.3 U6.8 | length 58.4
  Top Layer w0.2: v1@-6.815,-6.798 ccw(c-7.072,-6.226) U6.8@-6.445,-6.226 -6.445,-6.699 ; v1@-6.733,-6.981 ccw(c-6.933,-6.535) -6.445,-6.535 ; v1(-6.731,-6.985) -6.445,-6.699 ; v1@-6.7,-6.783 ccw(c-6.655,-6.489) -6.445,-6.699 ; v1@-6.529,-6.954 cw(c-6.235,-6.909) -6.445,-6.699 ; v1@-0.78,-0.49 ccw(c-1.129,-0.141) -0.635,-0.141 ccw(c-0.141,-0.141) v1@-0.49,-0.49 ; -0.768,20.06 cw(c0,19.292) T3.3@0,20.378 ; v1(-0.635,-0.635) -0.635,0.254 2.794,3.683 ; -0.544,20.284 ccw(c-0.996,20.735) T3.3@-0.357,20.735 ; v1(-0.508,4.064) 0,4.572 0,11.475 J1.6@0.676,12.151 0.676,13.929 -1.905,16.51 -1.905,18.923 T3.3@0,20.828 ; v1@-0.508,4.269 ccw(c-0.508,4.763) -0.158,4.414 ccw(c0.191,4.064) v1@-0.303,4.064 ; T3.3@-0.427,20.401 cw(c0,19.974) T3.3@0,20.578 ; J1.6@0.376,12.151 cw(c-0.348,12.151) 0.164,11.639 cw(c0.676,11.127) J1.6@0.676,11.851 ; J1.6@0.464,12.363 ccw(c-0.048,12.875) 0.676,12.875 ccw(c1.4,12.875) J1.6@0.888,12.363 ; 2.175,3.064 ccw(c1.175,4.064) v1@2.589,4.064 ; 2.516,3.405 ccw(c1.858,4.064) v1@2.789,4.064 ; v1@2.681,3.893 cw(c2.542,3.683) 2.794,3.683 ; v1(2.794,4.064) 2.794,3.683 ; 2.858,3.747 ccw(c2.541,4.064) v1@2.989,4.064 ; v1@2.907,3.893 ccw(c3.046,3.683) 2.794,3.683
  Bottom Layer w0.2: v1(-6.731,-6.985) -5.715,-6.985 -3.683,-9.017 -0.762,-9.017 -0.127,-8.382 -0.127,-3.175 -0.635,-2.667 v1(-0.635,-0.635) ; v1@-6.586,-7.13 cw(c-6.237,-7.479) -6.237,-6.985 cw(c-6.237,-6.491) v1@-6.586,-6.84 ; v1@-0.78,-0.78 cw(c-1.129,-1.129) -0.635,-1.129 cw(c-0.141,-1.129) v1@-0.49,-0.78 ; v1(-0.508,4.064) v1(2.794,4.064) ; v1@-0.363,3.919 cw(c-0.014,3.57) -0.014,4.064 cw(c-0.014,4.558) v1@-0.363,4.209 ; v1@2.649,3.919 ccw(c2.3,3.57) 2.3,4.064 ccw(c2.3,4.558) v1@2.649,4.209
RX2/SETKEY: C40.1 P2.3 U6.21 | length 38.6
  Top Layer w0.2: U6.21@-2.445,-4.626 1.778,-4.626 1.78,-4.624 5.155,-4.624 ; v1@5.257,-4.338 cw(c4.903,-4.373) 5.155,-4.624 ; v1@5.441,-4.522 ccw(c5.406,-4.876) 5.155,-4.624 ; v1(5.461,-4.318) 5.155,-4.624
  Top Layer w0.254: C40.1@-4.662,-18.53 cw(c-4.879,-18.747) -4.572,-18.747 cw(c-4.265,-18.747) C40.1@-4.482,-18.53 ; C40.1@-4.572,-18.263 ccw(c-4.572,-17.895) -4.312,-18.155 ; C40.1@-4.445,-18.39 cw(c-4.2,-18.39) C40.1@-4.373,-18.216 ; P2.3@-2.324,-22.165 ccw(c-2.854,-21.495) -2,-21.495 ; P2.3@-2,-22.575 -2,-21.495 ; P2.3@-1.676,-22.165 cw(c-1.146,-21.495) -2,-21.495 ; v1@5.335,-5.841 cw(c5.032,-6.144) 5.461,-6.144 cw(c5.89,-6.144) v1@5.587,-5.841 ; v1(5.461,-5.715) 5.461,-9.652 2.159,-12.954 2.159,-14.986 0.635,-16.51 -2.667,-16.51 C40.1@-4.572,-18.415 -4.572,-18.923 -2,-21.495
  Bottom Layer w0.254: v1@5.335,-5.589 ccw(c5.032,-5.286) 5.461,-5.286 ccw(c5.89,-5.286) v1@5.587,-5.589 ; v1@5.335,-4.444 cw(c5.032,-4.747) 5.461,-4.747 cw(c5.89,-4.747) v1@5.587,-4.444 ; v1(5.461,-5.715) v1(5.461,-4.318)